# EAGLE board ArduBerry 3_0 (EAGLE 6.3)
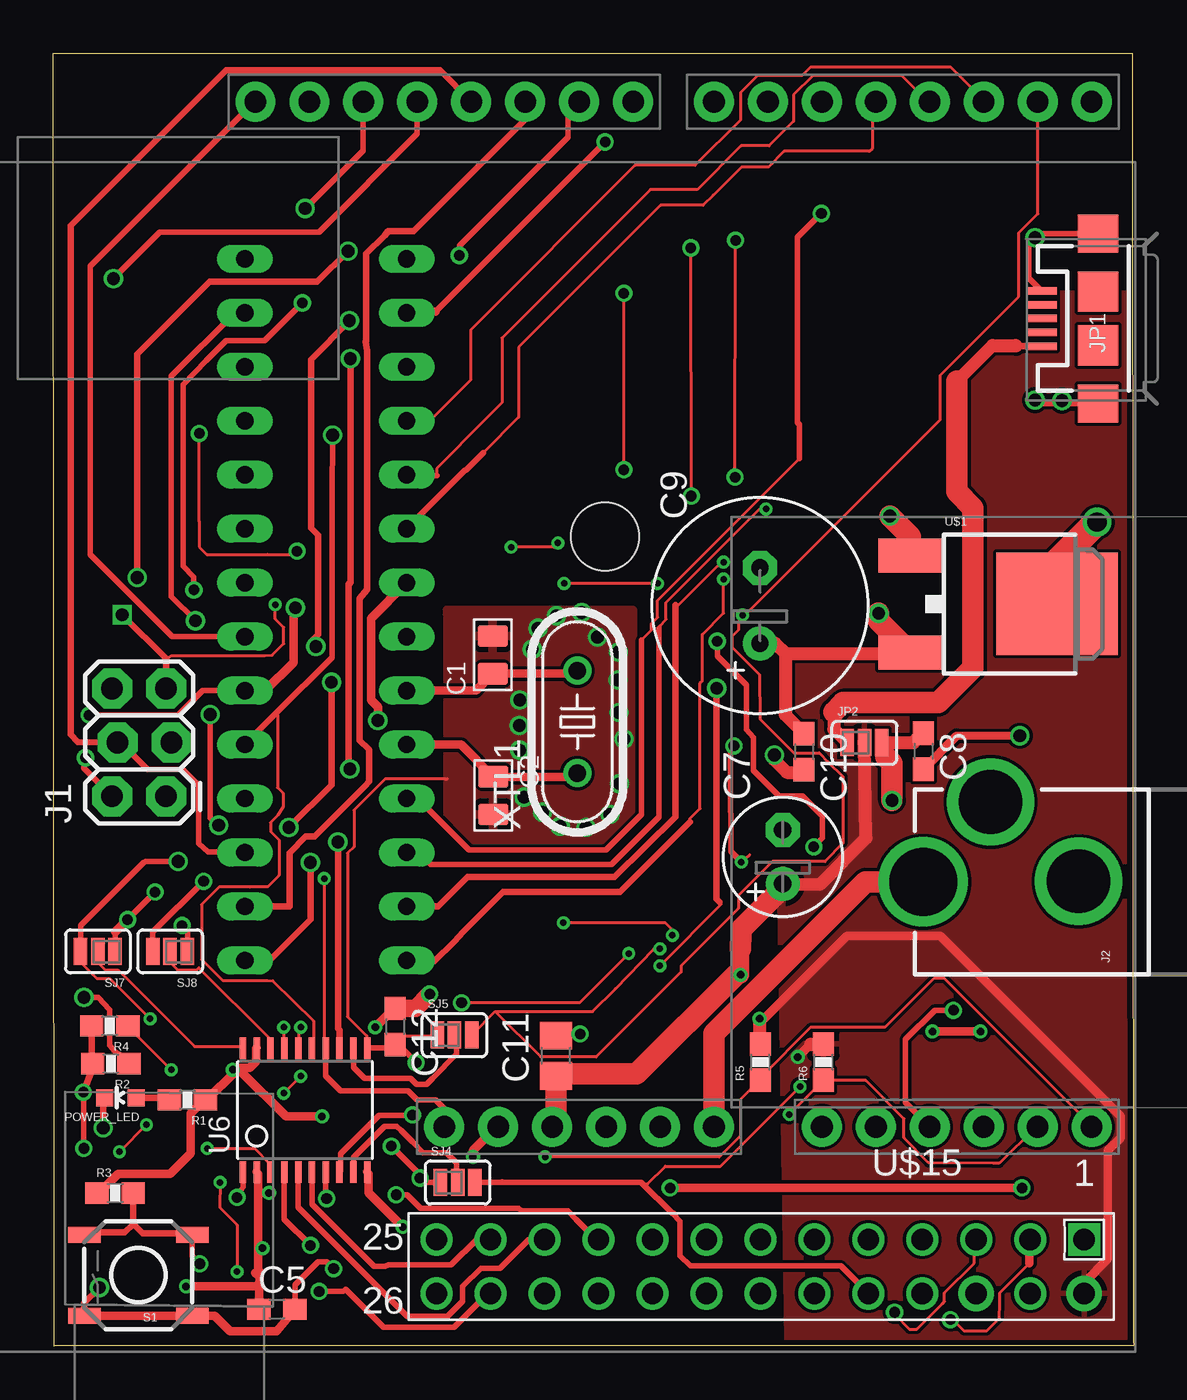
[diagram p0: board, top side]
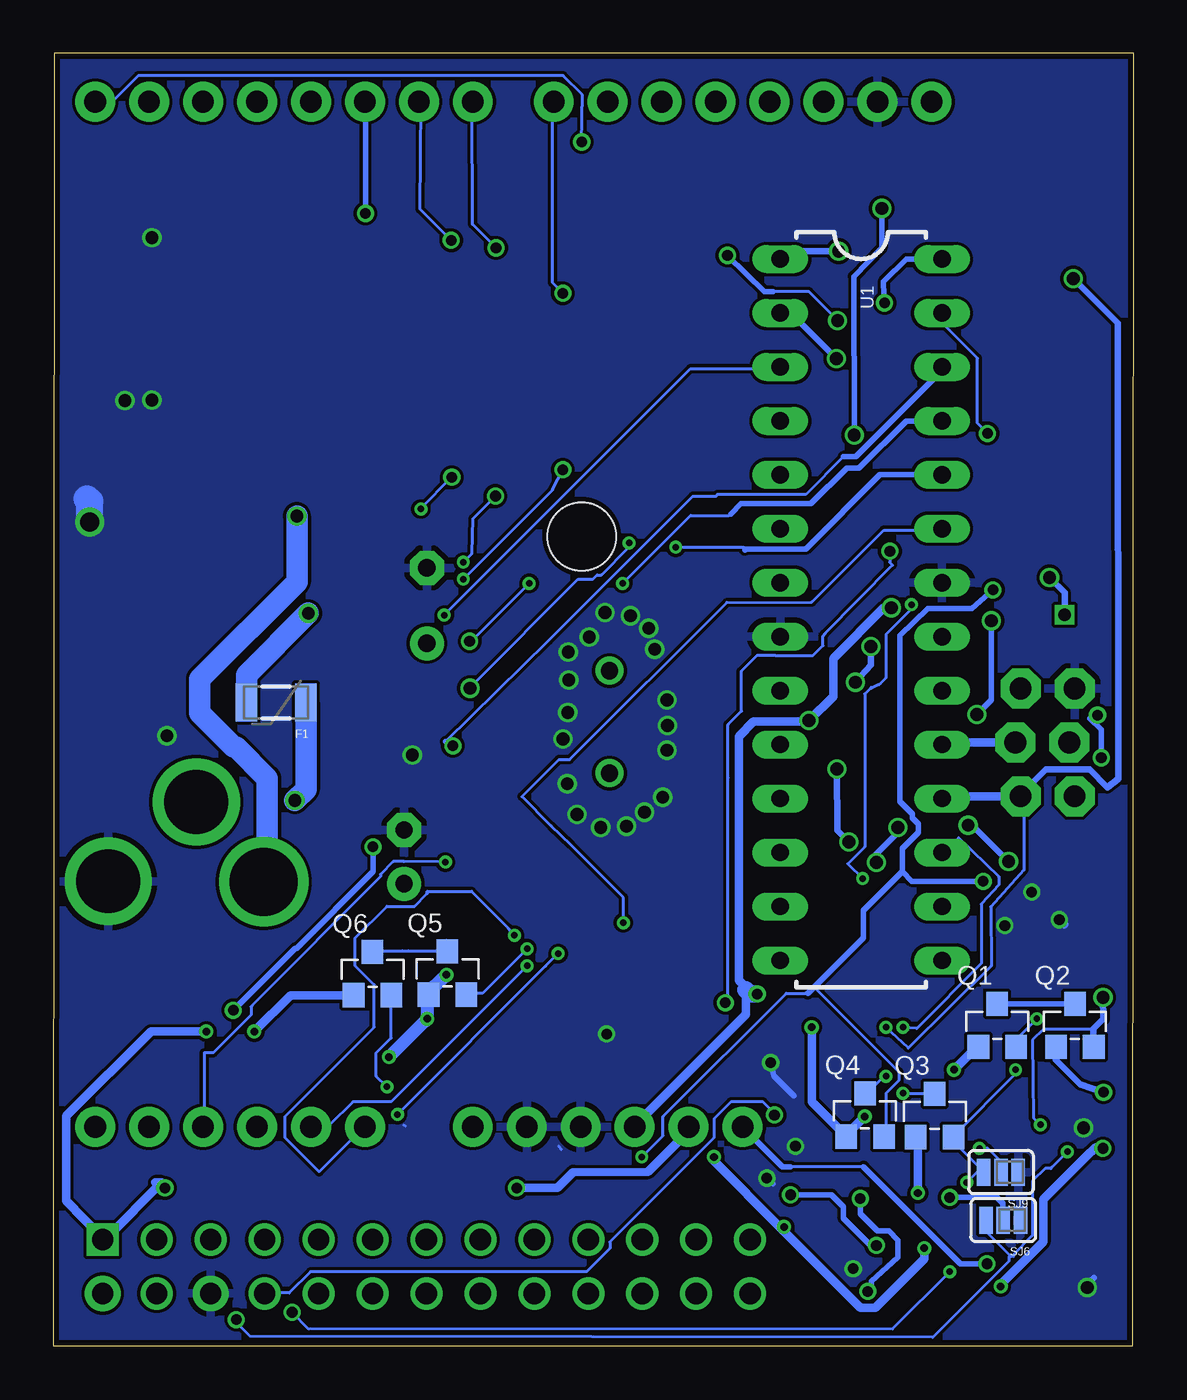
[diagram p1: board, bottom side, seen from below]

Size 50.88 x 60.89 mm. Coordinates in mm from the lower left corner, seen from the top.
Outline: 0.05,0 0,60.89 50.81,60.89 50.86,0.28 50.88,0.02 0.04,0.02
Copper layers (1*16): Top 0.035mm / dielectric 1.5mm / Bottom 0.035mm
Design rules "Fusion_eagle_rule_v1.1": minimum track width 6mil, minimum drill 12mil, track to track 6mil, track to pad 6mil, pad to pad 6mil, via to via 6mil, smd to smd 0mil, copper to edge 10mil, drill to drill 10mil, minimum pad ring 10mil, minimum via ring 6mil, stop-mask expansion 2mil, vias tented up to drill 100mil, thermal gap 10mil
Net classes: 1 DATA: width 0.203 mm, drill 0.305 mm, clearance 0.051 mm; 2 POWER: width 0.406 mm, drill 0.356 mm, clearance 0.051 mm
Holes 3.2 mm at -29.51,11.63 25.99,38.13

## Footprints (pad centres in the part's own frame; a part is rotated, then mirrored left to right if it is on the bottom)
C0805 = smd 1.016 x 1.397: 1 -0.889,0; 2 0.889,0
C0603 = smd 1.1 x 1: 1 -0.85,0; 2 0.85,0
E2,5-6 = drill 0.813 pad 1.6: + -1.27,0 | drill 0.813 pad 1.6 octagon: - 1.27,0
E3,5-10 = drill 0.813 pad 1.6: + -1.778,0 | drill 0.813 pad 1.6 octagon: - 1.778,0
C0805' = smd 1.3 x 1.5: 1 -0.95,0; 2 0.95,0
PTC-1206 = smd 1 x 1.8: 1 -1.4,0; 2 1.4,0
2X3_LOCK = drill 1.016 pad 1.88 octagon: 1 0,0; 2 0,2.54; 3 2.54,-0.254; 4 2.54,2.286; 5 5.08,0; 6 5.08,2.54
POWER_JACK_PTH_LOCK = drill 2.997 pad 4.115: GND 0.025,6.557; GNDBREAK 3.762,10.7 | drill 3.2 pad 4.115: PWR 0,13.878
USB-MICROB = smd 0.35 x 1.4: D+ 0,2.65; D- -0.65,2.65; GND 1.3,2.65; ID 0.65,2.65; VBUS -1.3,2.65 | smd 1.8 x 1.9: MT1 -4,0; MT2 4,0 | smd 1.9 x 1.9: P$1 -1.27,0; P$2 1.27,0
SJ_3_PASTE1&2 = smd 0.635 x 1.27: 1 -0.813,0; 2 0,0; 3 0.813,0
LED-0603 = smd 0.8 x 0.8: A 0,-0.75; C 0,0.75
SOT23 = smd 1.016 x 1.143: 1 -0.889,-1.016; 2 0.889,-1.016; 3 0,1.016
0603-RES = smd 1.1 x 1: 1 -0.85,0; 2 0.85,0
TACTILE_SWITCH_SMD = smd 1.524 x 0.762: 1 -2.54,1.905; 2 2.54,1.905; 3 -2.54,-1.905; 4 2.54,-1.905
DIL28-3 = drill 0.813 long: 1 -16.51,-3.81; 2 -13.97,-3.81; 3 -11.43,-3.81; 4 -8.89,-3.81; 5 -6.35,-3.81; 6 -3.81,-3.81; 7 -1.27,-3.81; 8 1.27,-3.81; 9 3.81,-3.81; 10 6.35,-3.81; 11 8.89,-3.81; 12 11.43,-3.81; 13 13.97,-3.81; 14 16.51,-3.81; 15 16.51,3.81; 16 13.97,3.81; 17 11.43,3.81; 18 8.89,3.81; 19 6.35,3.81; 20 3.81,3.81; 21 1.27,3.81; 22 -1.27,3.81; 23 -3.81,3.81; 24 -6.35,3.81; 25 -8.89,3.81; 26 -11.43,3.81; 27 -13.97,3.81; 28 -16.51,3.81
DUEMILANOVE_VIAS = drill 1.016 pad 1.88: 3.3V 50.8,13.97; 5V 50.8,16.51; A0 50.8,29.21; A1 50.8,31.75; A2 50.8,34.29; A3 50.8,36.83; A4 50.8,39.37; A5 50.8,41.91; AREF 2.54,2.54; D2 2.54,36.83; D3 2.54,34.29; D4 2.54,31.75; D5 2.54,29.21; D6 2.54,26.67; D7 2.54,24.13; D8 2.54,20.32; D9 2.54,17.78; D10 2.54,15.24; D11 2.54,12.7; D12 2.54,10.16; D13 2.54,7.62; GND@0 50.8,19.05; GND@1 50.8,21.59; GND@2 2.54,5.08; RES 50.8,11.43; RX 2.54,41.91; TX 2.54,39.37; VIN 50.8,24.13
TSSOP20 = smd 0.305 x 0.991: 1 -2.925,-2.918; 2 -2.275,-2.918; 3 -1.625,-2.918; 4 -0.975,-2.918; 5 -0.325,-2.918; 6 0.325,-2.918; 7 0.975,-2.918; 8 1.625,-2.918; 9 2.275,-2.918; 10 2.925,-2.918; 11 2.925,2.918; 12 2.275,2.918; 13 1.625,2.918; 14 0.975,2.918; 15 0.325,2.918; 16 -0.325,2.918; 17 -0.975,2.918; 18 -1.625,2.918; 19 -2.275,2.918; 20 -2.925,2.918
DPAK = smd 1.6 x 3: 1 -2.28,-5.31; 3 2.28,-5.31 | smd 4.826 x 5.715: 4 0,1.588
RASPBERRY-PI_REV1 = drill 1 square: 1 -41.91,21.59 | drill 1 pad 1.676: 2 -41.91,24.13; 6 -36.83,24.13 | drill 1: 3 -39.37,21.59; 4 -39.37,24.13; 5 -36.83,21.59; 7 -34.29,21.59; 8 -34.29,24.13; 9 -31.75,21.59; 10 -31.75,24.13; 11 -29.21,21.59; 12 -29.21,24.13; 13 -26.67,21.59; 14 -26.67,24.13; 15 -24.13,21.59; 16 -24.13,24.13; 17 -21.59,21.59; 18 -21.59,24.13; 19 -19.05,21.59; 20 -19.05,24.13; 21 -16.51,21.59; 22 -16.51,24.13; 23 -13.97,21.59; 24 -13.97,24.13; 25 -11.43,21.59; 26 -11.43,24.13
HC49/S = drill 0.813: 1 -2.413,0; 2 2.413,0

## Placement (x,y rotation side)
C1  22pF  [C0805]  20.7,32.56 90 top
C2  22pF  [C0805]  20.72,25.93 270 top
C5  0.1uf  [C0603]  10.54,1.75 0 top
C7  120uf  [E2,5-6]  34.35,23.05 90 top
C8  0.1uf  [C0603]  40.97,28.02 270 top
C9  1000uf  [E3,5-10]  33.28,34.88 90 top
C10  0.1uf  [C0603]  35.35,28 270 top
C11  10uf  [C0805']  23.68,13.69 90 top
C12  0.1uf  [C0603]  16.1,15.06 270 top
F1  PTCSMD  [PTC-1206]  40.37,30.32 180 bottom
J1  AVR_SPI_PRG_62X3_LOCK  [2X3_LOCK]  5.32,25.89 90 top
J2  POWER_JACKPTH_LOCK  [POWER_JACK_PTH_LOCK]  54.84,21.87 90 top
JP1  USB-MICROB  [USB-MICROB]  49.2,48.39 90 top
JP2  JUMPER-31-2  [SJ_3_PASTE1&2]  38.2,28.42 0 top
POWER_LED  GREEN  [LED-0603]  3.17,11.71 90 top
Q1  MOSFET-N-044020001  [SOT23]  6.43,15.11 0 bottom
Q2  MOSFET-N-044020001  [SOT23]  2.77,15.11 0 bottom
Q3  MOSFET-N-044020001  [SOT23]  9.37,10.87 0 bottom
Q4  MOSFET-N-044020001  [SOT23]  12.65,10.9 0 bottom
Q5  MOSFET-N-044020001  [SOT23]  32.31,17.58 0 bottom
Q6  MOSFET-N-044020001  [SOT23]  35.84,17.55 0 bottom
R1  330ohm  [0603-RES]  6.32,11.6 180 top
R2  10k  [0603-RES]  2.72,13.31 180 top
R3  10kOhm  [0603-RES]  2.92,7.21 0 top
R4  10k  [0603-RES]  2.67,15.09 180 top
R5  10k  [0603-RES]  33.3,13.39 90 top
R6  10k  [0603-RES]  36.27,13.39 90 top
S1  [TACTILE_SWITCH_SMD]  4.01,3.35 180 top
SJ4  [SJ_3_PASTE1&2]  19.05,7.72 0 top
SJ5  [SJ_3_PASTE1&2]  18.9,14.66 0 top
SJ6  [SJ_3_PASTE1&2]  6.15,5.94 180 bottom
SJ7  [SJ_3_PASTE1&2]  2.11,18.59 180 top
SJ8  [SJ_3_PASTE1&2]  5.51,18.59 180 top
SJ9  [SJ_3_PASTE1&2]  6.25,8.2 180 bottom
U1  ATMEGA328P_PDIP  [DIL28-3]  12.83,34.68 270 bottom
U2  ARDUINO_SHIELDNO_SILK  [DUEMILANOVE_VIAS]  6.98,61.14 270 top
U6  [TSSOP20]  11.86,11.13 0 top
U$1  LM2931_FIXED  [DPAK]  45.67,34.95 270 top
U$15  RASPBERRY-PI_REV1  [RASPBERRY-PI_REV1]  6.63,26.62 180 top
XTL1  [HC49/S]  24.68,29.4 90 top

## Library data of the parts
C1 C2 Q1-Q6 = OPL
C5 C8 C10 C12 = resistor
C7 C9 C11 = rcl
F1 = zz SparkFun
J1 J2 = SparkFun-Connectors
JP1 = SparkFun-Connectors; PROD_ID: CONN-09505
JP2 SJ4-SJ9 = SparkFun-Passives
POWER_LED = SparkFun-LED; PROD_ID: DIO-00821
R1-R6 = SparkFun-Resistors
S1 = SparkFun-Electromechanical; PROD_ID: SWCH-08247
U1 = SparkFun-DigitalIC
U2 = SparkFun-Boards
U6 = adafruit
U$1 = SparkFun-PowerIC
U$15 = RaspberryPi
XTL1 = crystal; OC_FARNELL: 1667008; OC_NEWARK: unknown

## Nets
5V_IN_USB: JP1.VBUS JP2.1
+3V3 [POWER]: C5.1 Q2.1 Q3.1 Q6.1 R2.2 R4.2 U2.3.3V U6.2 U6.10 U$15.1
+5V [POWER]: C7.+ C11.1 C12.1 J1.2 JP2.2 Q1.1 Q4.1 Q5.1 R1.1 R3.1 R5.2 R6.2 U1.7 U1.20 U2.5V U6.19 U$15.2
ARDUINO_RX: U1.2 U2.RX U6.13
ARDUINO_TX: Q5.2 SJ5.3 U1.3 U2.TX
AREF [DATA]: U1.21 U2.AREF
GND: C1.2 C2.2 C5.2 C7.- C8.2 C9.- C10.2 C11.2 C12.2 J1.6 J2.GND JP1.GND JP1.MT1 JP1.MT2 POWER_LED.C S1.1 S1.2 SJ4.1 SJ5.1 SJ6.1 SJ7.1 SJ8.1 SJ9.1 U1.8 U1.22 U2.GND@0 U2.GND@1 U2.GND@2 U6.11 U$1.4 U$15.6
MISO: J1.1 U1.18 U2.D12 U6.16
MOSI: J1.4 U1.17 U2.D11 U6.17
N$1: Q1.3 Q2.3
N$2: Q3.3 Q4.3
N$3: Q5.3 Q6.3
N$4: U$15.26
N$7: SJ6.2 U6.1
N$8: SJ9.2 U6.3
N$9: SJ4.2 U6.9
N$11: POWER_LED.A R1.2
N$13: SJ5.2 U6.12
N$14: SJ8.2 U6.18
N$15: SJ7.2 U6.20
N$48: U$15.7
N$49: U$15.9
N$50: U$15.11
N$51: U$15.13
N$52: U$15.15
N$53: U$15.17
N$54: U$15.25
N$61: U$15.22
N$62: U$15.20
N$63: U$15.18
N$64: U$15.16
N$65: U$15.14
N$66: U$15.12
OSC1: C1.1 U1.9 XTL1.2
OSC2: C2.1 U1.10 XTL1.1
PB0: U1.14 U2.D8
PB1: U1.15 U2.D9
PB2: U1.16 U2.D10
PC0: U1.23 U2.A0
PC1: U1.24 U2.A1
PC2: U1.25 U2.A2
PC3: U1.26 U2.A3
PD2: U1.4 U2.D2
PD3: U1.5 U2.D3
PD4: U1.6 U2.D4
PD5: U1.11 U2.D5
PD6: U1.12 U2.D6
PD7: U1.13 U2.D7
REG_OUT [POWER]: C8.1 F1.1 JP2.3
RESET: J1.5 R3.2 S1.3 S1.4 U1.1 U2.RES U6.14
RPI_MISO: U6.5 U$15.21
RPI_MOSI: U6.4 U$15.19
RPI_RESET: U6.7 U$15.24
RPI_RX: Q6.2 SJ4.3 U$15.10
RPI_SCK: U6.6 U$15.23
RPI_SCL: Q3.2 R4.1 SJ9.3 U$15.5
RPI_SDA: Q2.2 R2.1 SJ6.3 U$15.3
RPI_TX: U6.8 U$15.8
SCK: J1.3 U1.19 U2.D13 U6.15
SCL: Q4.2 R5.1 SJ8.3 U1.28 U2.A5
SDA: Q1.2 R6.1 SJ7.3 U1.27 U2.A4
VIN: J2.PWR U2.VIN U$1.1
VIN_5V: C9.+ C10.1 F1.2 U$1.3

## Tracks (layer width: path | path; a pad name or v marks a point on that pad's centre or on a via)
5V_IN_USB
  Top 0.305: 45.34,47.09 JP1.VBUS
  Top 0.61: 42.55,45.44 44.22,47.12 45.31,47.12 45.34,47.09 | 36.75,29.87 36.75,29.06 JP2.1
  Top 1.016: 42.55,45.44 42.55,40.23 43.31,39.47 43.31,31.93 41.68,30.3 37.19,30.3 36.75,29.87
+3V3  (via drill 0.36, 0.5)
  Top 0.254: v1.45,9.32 1.45,11.94 v1.42,11.96
  Top 0.305: R4.2 1.82,13.36 R2.2 1.87,13.09 v1.42,11.96
  Top 0.406: C5.1 9.71,2.82 | 9.71,2.82 9.71,3.32 | 9.71,3.32 9.71,3.42 | 9.71,3.42 9.72,3.52 9.72,3.53 | 9.66,4.62 9.66,3.72 9.66,3.52 9.66,3.32 9.71,3.32 | 9.66,4.62 9.66,7.22 | 9.66,7.22 9.66,8.12 U6.2 | v10.16,7.22 9.86,7.22 9.66,7.22 | v19.76,8.92 19.76,9.22 20.86,10.32 U2.3.3V | v9.86,4.62 9.66,4.62 | v43.66,14.82 v41.4,14.82 | v45.61,7.46 v29.05,7.46 | 9.71,3.42 9.56,3.42 9.51,3.47 | v16.46,5.62 14.86,7.22 14.86,8.12 U6.10 | v6.26,2.82 9.56,2.82 9.71,2.82
  Bottom 0.254: 1.78,9.37 1.55,9.22 v1.45,9.32
  Bottom 0.305: v1.42,11.96 2.51,12.34 3.66,13.49 Q2.1
  Bottom 0.406: v10.16,7.22 10.16,9.82 Q3.1 | v9.86,4.62 9.86,4.12 12.16,1.82 12.86,1.82 16.56,5.52 | 16.56,5.52 19.86,8.82 v19.76,8.92 | v41.4,14.82 39.7,16.52 36.76,16.52 Q6.1 | v43.66,14.82 46.26,14.82 50.26,10.85 50.26,6.85 48.56,5.12 U$15.1 48.36,5.12 45.76,7.72 46.06,7.72 v45.61,7.46 | v29.05,7.46 28.73,7.47 27.13,7.47 26.39,8.2 22.86,8.22 20.96,10.12 20.96,10.32 U2.3.3V | v16.46,5.62 16.56,5.52 | v6.26,2.82 6.26,2.92 4.26,4.92 4.26,6.92 2.26,8.92 1.78,9.37 | 1.46,12.12 v1.42,11.96
+5V  (via drill 0.36, 0.5, 0.6)
  Top 0.254: U1.20 7.05,30.87 5.89,29.72 v1.7,29.72 | v1.52,27.71 1.45,27.22 J1.2
  Top 0.406: U2.5V 23.68,10.34 | U1.20 9.99,30.87 11.33,32.21 11.33,34.7 v11.4,34.77 | v15.29,29.46 15.29,30.1 14.96,30.43 14.96,34.27 U1.7 | v15.16,15.02 15.96,15.82 16.06,15.82 C12.1 | 8.86,13.12 8.76,13.12 8.56,12.92 | 8.86,13.12 9.26,13.12 9.56,13.42 9.56,14.02 U6.19 | 8.56,12.92 7.26,11.62 R1.1 7.06,11.52 7.04,11.53 6.48,10.97 6.48,9.09 5.5,8.12 3.66,8.12 3.06,8.12 2.16,7.22 R3.1 | v12.66,10.82 10.96,10.82 8.86,12.92 8.86,13.12 | v8.46,13.02 8.56,12.92 | 33.26,14.32 R5.2 | v35.06,13.62 35.66,14.22 | 34.26,21.52 C7.+ | v33.26,15.42 33.46,15.42 37.36,19.32 41.76,19.32 50.26,10.82 50.26,9.82 49.66,9.22 49.66,4.12 48.56,3.02 48.56,2.52 U$15.2 | 23.86,12.82 C11.1 | 32.16,17.52 v32.36,17.5
  Top 0.61: C7.+ 36.1,21.75 38.28,23.93 JP2.2 | v33.26,15.42 33.26,14.32 | 35.66,14.22 36.26,14.22 R6.2
  Top 0.813: 32.36,18.72 v32.36,17.5 | C12.1 17.06,15.91 v17.73,16.59
  Top 1.016: 23.68,10.34 C11.1 | 32.36,18.72 32.39,19.41 32.41,19.65 34.26,21.52 | 23.86,12.82 27.46,12.82 32.16,17.52
  Bottom 0.254: v1.7,29.72 2.06,29.57 1.52,29.03 1.52,27.99 v1.52,27.71
  Bottom 0.406: v11.4,34.77 11.76,34.77 14.15,32.38 14.15,30.61 v15.29,29.46 15.46,29.42 17.89,29.42 18.59,28.72 18.59,17.22 18.26,16.89 18.26,16.79 18.26,15.62 23.46,10.42 U2.5V | 7.36,14.12 Q1.1 7.46,14.02 v8.46,13.02 | v15.16,15.02 15.16,11.52 13.56,9.92 Q4.1 13.46,10.02 v12.66,10.82 | 33.26,16.52 Q5.1 33.06,16.72 | 33.36,15.32 v33.26,15.42
  Bottom 0.61: 33.26,16.52 v33.26,15.42 | 33.36,15.32 v35.06,13.62 | 33.06,16.72 33.06,16.82 v32.36,17.5
  Bottom 0.813: v17.73,16.59 18.06,16.59 18.26,16.79
  pour Top: 33.78,49.5 34.54,0.23 50.65,0.13 50.75,49.61
ARDUINO_RX  (via drill 0.5, 0.6)
  Top 0.254: 18.01,48.72 v25.99,56.7
  Top 0.305: v14,46.51 14,35.97 13.92,35.89 13.92,30.23 | 13.92,30.23 13.92,30.2 13.92,30.23 | 13.92,30.23 13.92,27.66 v13.97,27.18 | v13.41,23.75 13.41,14.96 13.49,14.88 U6.13
  Top 0.406: 18.01,48.72 16.71,48.72 U1.2
  Bottom 0.152: v25.99,56.7 25.96,58.92 26.86,59.82 46.86,59.82 48.06,58.62 48.86,58.62 U2.RX
  Bottom 0.305: U1.2 16.14,48.65 v14,46.51 | v13.97,27.18 13.94,24.28 v13.41,23.75
ARDUINO_TX  (via drill 0.3)
  Top 0.152: v28.56,18.72 28.28,18.72 26.47,16.84 25.4,15.77 20.81,15.77 | 20.81,15.77 19.76,14.72 SJ5.3 | 32.51,34.37 34.36,36.22 41.76,43.62 41.76,45.72 45.46,49.42 45.46,52.42 46.36,53.32 46.36,58.42 U2.TX | 32.51,34.37 32.26,34.12 32.26,33.72 31.96,33.42 31.96,32.92 33.26,31.62 33.29,29.53 34.01,28.8 34.87,27.94 36.07,27.94 36.49,27.52 37.19,26.82 37.19,25.52 37.19,23.69 36.34,22.82 33.86,22.82 32.26,21.22 32.26,20.62 29.56,17.92 29.56,17.62 25.56,13.62 22.96,13.62 20.86,15.72 20.81,15.77 | v32.46,34.42 32.51,34.37
  Top 0.254: U2.TX 46.36,58.52
  Top 0.305: U1.3 17.64,46.11
  Bottom 0.152: v28.56,18.72 30.66,16.62 31.36,16.62 Q5.2 | v32.46,34.42 20.86,46.02 16.66,46.02 U1.3
AREF
  Top 0.254: U2.AREF 9.5,58.6 1.75,50.85 1.75,37.29 5.61,33.43 9.01,33.43 U1.21
GND  (via drill 0.5, 0.6, 0.9)
  Top 0.152: SJ5.1 18.06,14.62 16.46,14.62 16.16,14.32 C12.2 | 23.76,14.72 C11.2 | 34.26,24.22 C7.- | U6.11 14.76,14.12 14.76,14.62 13.86,15.52 13.86,23.22 14.16,23.52 14.16,25.25 15.64,26.72 18.46,26.72 18.57,26.72 | 46.25,44.48 46.26,44.52 v46.23,44.55 | 46.13,52.25 46.16,52.22 v46.23,52.2
  Top 0.254: JP1.MT2 46.27,52.39 46.13,52.25 45.95,52.07 45.95,50.29 JP1.GND | JP1.MT1 46.34,44.39 46.25,44.48 | U6.11 15.93,14.04 | 15.93,14.04 C12.2 | SJ4.1 17.48,7.72 v17.27,7.92 17.27,8.08 v15.93,9.42 | SJ7.1 2.92,19.51 | SJ8.1 6.32,19.56 v6.07,19.81 | 23.76,14.72 v24.8,14.72 v24.82,14.71 | v3.51,20.09 4.78,21.36 v4.8,21.39 | 15.93,14.04 16.44,14.04 v17.09,13.36 | C5.2 11.39,2.91 12.47,3.99 12.88,3.99 v13.21,3.66
  Top 0.305: POWER_LED.C 2.37,11.51 v2.36,10.29 | S1.2 1.47,2.06 v2.18,2.77
  Top 0.406: S1.2 S1.1 7.59,1.45 8.33,0.71 10.53,0.71 C5.2 | C8.2 42.53,28.74 v45.52,28.75 | 2.92,19.51 v3.51,20.09
  Top 0.61: v33.96,27.84 33.96,27.61 34.54,27.03 35.22,27.03 C10.2
  Top 1.27: U$1.4 47.26,36.92 v49.15,38.81
  Bottom 0.152: 17.36,7.92 v17.27,7.92 | U2.GND@1 28.56,10.42 28.52,10.39 | 26.16,10.32 U2.GND@0 | 26.16,10.32 U2.GND@0 | 26.16,10.32 U2.GND@0 | 26.16,10.32 U2.GND@0 | 26.16,10.32 U2.GND@0 | 26.16,10.32 U2.GND@0 | 26.16,10.32 U2.GND@0 | SJ9.1 5.46,8.22 5.44,8.22 | 34.36,10.42 34.29,10.36 34.36,10.42 | 27.06,9.42 26.95,9.27 27.06,9.42
  Bottom 0.254: v17.27,7.92 16.99,7.65 | 3.28,19.86 3.4,19.86 3.51,19.96 | v6.07,19.81 6.07,19.84 5.92,19.99 | v24.82,14.71 25.07,14.71 | v17.09,13.36 16.94,12.73 16,11.79 | v13.21,3.66 13.21,3.61 13.23,3.58 | v15.93,9.42 15.93,9.47 16.05,9.6 16.05,9.65 16.08,9.65
  Bottom 0.305: v2.18,2.77 2.18,2.92 1.88,3.23
  Bottom 0.406: v3.51,20.09 3.28,19.86
  Bottom 1.27: v49.15,38.81 49.15,39.78 49.28,39.9
  other vias: 47.5,44.53 26.62,32.69 26.59,31.37 26.64,29.85 26.87,28.6 26.67,26.49 21.97,30.43 21.95,29.24 21.97,28.07 22.17,25.86 23.04,25.15 23.88,24.49 25.1,24.43 26.21,25.04 22.56,32.82 22.83,33.81 23.7,34.39 24.89,34.54 25.63,33.4
  pour Bottom: 0.03,64.74 50.93,64.74 50.93,-0.28 0.1,-0.28 0.1,64.14
  pour Top: 18.54,34.7 27.3,34.67 27.3,23.72 18.57,23.72 18.57,34.11
MISO  (via drill 0.3, 0.6)
  Top 0.152: v11.66,15.02 11.56,14.92 11.56,14.12 U6.16
  Top 0.254: U2.D12 17.15,57.1 12.52,52.45 5.03,52.45 3.44,50.89 3.2,50.65
  Top 0.305: v2.84,50.27 2.84,50.29 3.44,50.89
  Bottom 0.152: v11.66,15.02 10.61,14.04 6.71,17.92 6.73,20.7 5.16,22.42 5.16,25.82 J1.1
  Bottom 0.305: J1.1 5.32,25.97 4.14,27.15 2.06,27.15 1.24,26.31 0.74,26.72 0.76,48.18 v2.84,50.27
  Bottom 0.406: J1.1 9.02,25.89 U1.18
MOSI  (via drill 0.3)
  Top 0.152: v10.86,15.02 10.86,14.12 U6.17
  Top 0.254: J1.4 3.19,28.43 4.45,27.15 6.1,27.15 6.86,26.42 6.86,23.67 7.29,23.27 8.6,23.27 U1.17
  Top 0.305: 3.19,28.43 1.16,28.46 0.84,28.8 0.84,52.76 8.15,60.07 18.21,60.07 U2.D11
  Bottom 0.152: v10.86,15.02 10.21,14.97 7.18,18.02 7.18,20.83 6.36,21.72 6.36,22.12 8.24,23.94 8.94,23.24 U1.17
N$1
  Bottom 0.254: Q2.3 Q1.3
N$2  (via drill 0.3)
  Top 0.152: v11.66,12.72 v10.86,11.92
  Bottom 0.152: v10.86,11.92 9.46,11.92 Q3.3 | v11.66,12.72 11.76,12.72 12.56,11.92 Q4.3
N$3
  Bottom 0.152: Q5.3 32.36,18.62 32.36,19.12 32.85,18.62 34.14,18.62 34.44,18.62 35.76,18.62 Q6.3
N$7  (via drill 0.5)
  Top 0.254: U6.1 8.94,7.51 v8.66,7.01
  Bottom 0.254: v8.66,7.01 6.45,7.01 6.17,6.73 6.17,5.97 SJ6.2
N$8  (via drill 0.3)
  Top 0.152: v7.26,9.32 9.48,9.33 10.16,8.62 10.16,8.22 U6.3
  Bottom 0.152: v7.26,9.32 6.86,9.32 6.06,8.52 6.06,8.32 6.16,8.22 SJ9.2
N$9
  Top 0.254: U6.9 14.14,8.9 15.6,10.36 16.18,10.36 16.38,10.16 16.61,9.93 16.92,9.63 17.42,9.12 17.86,9.12 18.52,9.12 19,8.64 19,7.77 SJ4.2
N$11
  Top 0.305: POWER_LED.A 5.37,11.71 R1.2
N$13
  Top 0.254: U6.12 14.14,13.14 14.66,12.62 16.46,12.62 16.84,12.62 17.12,12.34 17.58,12.34 17.86,12.62 19,13.77 19,14.55 SJ5.2
N$14
  Top 0.152: U6.18 10.16,14.12 10.16,14.52 6.86,17.82 6.76,17.72 5.86,17.72 5.26,18.32 5.46,18.52 SJ8.2
N$15
  Top 0.152: U6.20 8.86,14.12 6.66,14.12 3.06,17.72 2.46,17.72 1.86,18.32 2.06,18.52 SJ7.2
OSC1
  Top 0.406: U1.9 19.9,30.87 C1.1 24.54,31.67 XTL1.2
OSC2
  Top 0.406: XTL1.1 24.51,26.82 C2.1 19.21,28.33 U1.10
PB0  (via drill 0.3, 0.5)
  Top 0.152: v26.87,41.27 v26.87,49.58 | v31.56,36.12 31.56,34.52 30.56,33.52 30.56,31.32 30.46,31.22 30.46,25.32 29.96,24.82 29.97,24.69
  Top 0.305: U1.14 17.97,18.15 18.87,19.05 19.33,19.53 21.18,21.39 26.7,21.39 29.97,24.69
  Bottom 0.152: v26.87,41.27 27.33,40.39 27.36,40.32 v31.56,36.12 | v26.87,49.58 27.36,50.07 27.36,58.52 U2.D8
PB1  (via drill 0.5, 0.6)
  Top 0.254: v19.13,51.36 19.13,51.82 24.23,56.92 24.23,58.06 U2.D9
  Top 0.305: v13.94,48.29 13.94,48.26 12.14,46.46 12.14,38.56 | 12.14,38.56 12.14,38.53 | 12.14,38.53 12.14,38.56 | 12.14,38.56 12.14,38.53 | 12.14,38.53 12.47,38.2 12.47,33.5 12.14,33.17 v12.37,32.94 | v13.11,31.27 13.11,26.44 v11.1,24.43 | v12.12,22.78 12.12,20.09 10.46,18.44 10.2,18.17 U1.15
  Bottom 0.152: 16.99,49.65 15.29,49.65 13.96,48.32 v13.94,48.29 | 24.76,58.52 U2.D9
  Bottom 0.254: 16.99,49.65 17.39,49.65 v19.13,51.36
  Bottom 0.305: v12.37,32.94 12.37,32.08 v13.11,31.27 | v11.1,24.43 11.1,24.21 12.12,23.19 12.12,23.04 v12.12,22.78
PB2
  Top 0.305: U2.D10 22.23,57.76 16.97,52.5 15.77,52.5 15.6,52.3 14.73,51.43 14.73,49.99 14.73,47.32 14.71,47.29 14.78,46.89 14.78,43.74 14.78,35.64 14.43,35.2 14.43,28.52 14.86,28.12 14.88,28.07 14.89,26.6 14.68,26.39 12.32,24 11.89,24 11.13,23.24 11.13,20.7 U1.16
PC0  (via drill 0.3)
  Top 0.152: v29.16,19.35 29.16,19.61 28.83,19.94 v24.03,19.94
  Bottom 0.152: v29.16,19.35 29.46,19.71 31.17,21.42 33.26,21.42 33.26,21.32 33.86,20.72 35.16,20.72 36.66,19.22 36.66,17.92 35.76,17.02 35.76,15.02 39.96,10.82 39.96,9.82 38.36,8.22 36.26,10.32 U2.A0 | v24.03,19.94 24.03,21.13 26.49,23.6 27.43,24.51 28.8,25.88 27.06,27.62 26.56,27.62 19.16,35.02 15.15,35.05 11.75,38.42 9.06,38.42 U1.23
PC1  (via drill 0.3, 0.6)
  Top 0.152: v28.56,17.92 31.46,20.82 31.37,20.93 | v21.56,37.62 23.56,37.62 v23.76,37.82
  Top 0.305: v31.24,30.99 31.24,21.06 31.37,20.93
  Bottom 0.152: v28.56,17.92 34.96,11.52 36.76,11.52 37.86,10.42 38.66,10.42 U2.A1 | v21.56,37.62 18.36,37.62 18.26,37.54 | v23.76,37.82 23.76,37.62 25.06,36.32 25.26,36.32 25.46,36.12 26.16,36.12 31.16,31.12 v31.24,30.99
  Bottom 0.254: U1.24 11.95,41.03 15.44,37.54 18.26,37.54 18.31,37.49
  Bottom 0.305: 31.22,31.01 v31.24,30.99
PC2  (via drill 0.3, 0.5)
  Top 0.152: v28.46,35.92 v24.06,35.92
  Top 0.254: v31.27,33.2 31.27,32.51 32.64,31.14 32.64,29.03 32.97,28.68 32.97,27.1 34.16,25.91 35.28,25.91 36.22,24.97 36.22,23.93 v35.81,23.52 | v42.39,15.82 41.5,15.82 40.13,14.45 40.13,11.48 U2.A2
  Bottom 0.152: v24.06,35.92 20.86,39.12 19.06,39.12 18.97,39.19 | v28.46,35.92 31.16,33.22 v31.27,33.2
  Bottom 0.254: U1.25 10.71,43.57 12.93,41.35 13.51,41.35 15.19,39.67 18.49,39.67 18.97,39.19 | v35.81,23.52 35.81,22.35 39.42,18.75 39.47,18.75 v42.39,15.82
PC3  (via drill 0.3, 0.5)
  Top 0.152: 32.79,23.14 v32.41,22.8
  Top 0.254: v32.05,28.27 32.05,28.06 31.9,27.91 31.9,25.83 31.9,24.41 31.9,23.3 v32.41,22.8
  Bottom 0.152: 13.67,41.88 15.44,40.11 18.11,40.11 19.61,40.11 19.66,40.02 20.76,40.02 27.56,33.22 32.39,28.48 | v32.41,22.8 34.36,22.82 34.86,22.82 35.46,22.22 35.46,22.12 41.5,16.05 41.55,16 41.55,15.6 43.33,13.82 43.76,13.82 43.76,10.42 U2.A3
  Bottom 0.254: U1.26 9.02,45.94 13.08,41.88 13.67,41.88 | 32.39,28.48 32.26,28.48 v32.05,28.27
PD2
  Top 0.152: U1.4 16.76,43.62 17.86,43.62 17.75,43.59 19.66,45.49 19.66,47.85 27.41,55.6 30.23,55.6 32.36,57.74 32.36,58.12 32.36,59.02 33.16,59.82 35.26,59.82 35.66,60.22 42.26,60.22 43.76,58.72 U2.D2
  Top 0.254: U2.D2 43.82,58.5 | 16.66,43.59 U1.4
PD3
  Top 0.152: 18.06,41 18.06,41.12 18.06,41.32 20.32,43.61 21.13,44.42 21.13,47.47 28.12,54.46 30.33,54.46 32.39,56.51 33.71,56.51 34.86,57.67 34.86,58.12 34.86,58.92 35.76,59.82 39.96,59.82 41.16,58.62 U2.D3
  Top 0.254: U2.D3 41.28,58.47 | 18.08,41 18.06,41 16.68,41 U1.5
PD4
  Top 0.152: 20.27,42.09 21.92,43.74 21.92,47.04 28.6,53.72 30.61,53.72 31.09,54.2 32.41,55.52 33.68,55.52 34.42,56.26 38.43,56.26 38.56,56.39 38.56,58.52 U2.D4
  Top 0.254: U2.D4 38.66,58.6 | U1.6 19.4,41.25 19.43,41.25 20.27,42.09
PD5  (via drill 0.5)
  Top 0.152: 35.15,41.8 28.46,35.12 28.46,34.32 28.16,34.02 28.16,33.72 27.76,33.32 27.71,33.25
  Top 0.254: U2.D5 36.2,58.55 | 17.64,25.79 17.64,25.31 19.58,23.37 26.04,23.37 27.71,25.04 27.71,33.25 | v36.17,53.34 35.05,52.22 35.05,43.48 35.15,43.39 35.15,41.8
  Top 0.305: U1.11 17.64,25.79
  Bottom 0.152: 36.16,58.52 U2.D5
  Bottom 0.254: v36.17,53.34 36.17,58.57 U2.D5
PD6  (via drill 0.3, 0.5)
  Top 0.152: v32.11,40.92 v32.13,52.07 | v33.56,39.42 33.26,39.42 28.86,35.02 28.86,34.22 28.56,33.92 28.52,33.81
  Top 0.254: U1.12 17.19,23.25 17.78,22.68 26.29,22.68 28.52,24.92 28.52,33.81
  Top 0.305: U2.D6 33.66,58.14
  Bottom 0.152: v33.56,39.42 33.55,39.47 v32.11,40.92 | v32.13,52.07 33.59,53.53 33.56,58.52 U2.D6
PD7  (via drill 0.3, 0.5)
  Top 0.152: v30.05,40.03 v30.02,51.71 | v31.56,36.92 31.46,36.92 29.46,34.92 29.31,34.9
  Top 0.305: U1.13 18.12,20.71 | 18.12,20.71 17.92,20.74 18.12,20.71 | 18.12,20.71 19.51,22.1 25.93,22.1 26.44,22.1 29.31,24.92 29.31,34.9
  Bottom 0.152: v30.05,40.03 31.12,38.96 31.16,37.32 v31.56,36.92 | v30.02,51.71 31.14,52.83 31.16,58.52 U2.D7
REG_OUT  (via drill 0.6)
  Top 0.406: 39.22,27.74 39.22,28.22 JP2.3
  Top 0.61: JP2.3 40.5,28.42 C8.1
  Top 1.016: v39.5,25.7 39.5,27.46 39.22,27.74
  Bottom 1.016: F1.1 38.97,26.23 v39.5,25.7
RESET  (via drill 0.3, 0.5, 0.6)
  Top 0.152: v12.76,22.02 12.76,14.12 U6.14 | v10.46,34.92 10.46,34.25 10.86,33.85 10.86,33.09 10.31,32.54 9.96,32.52 5.56,32.52 5.46,32.42 5.32,32.38
  Top 0.254: U6.14 12.84,12.74 13.54,12.04 15.37,12.04 15.9,12.04 16.71,12.04 17.15,11.61 18.01,11.61 18.42,11.2 18.42,10.62 U2.RES | S1.3 6.55,4.24 v6.91,3.89
  Top 0.305: S1.4 1.57,5.36 3.38,5.36 3.77,5.75 R3.2 3.77,5.78 4.22,5.33 6.48,5.33 S1.3 | J1.5 5.32,32.38 v3.25,34.44 | v3.96,36.19 3.96,46.71 7.37,50.11 12.42,50.11 v13.89,51.56
  Bottom 0.152: 12.73,8.46 16.15,8.46 | v12.76,22.02 13.46,22.72 12.66,23.52 12.66,30.72 12.36,31.02 12.34,30.99 11.99,31.16 11.94,31.2 11.66,31.48 11.66,33.52 10.46,34.72 v10.46,34.92
  Bottom 0.254: 12.73,8.46 9.53,5.26 8.15,3.89 v6.91,3.89 | 16.15,8.46 16.54,8.46 U2.RES
  Bottom 0.305: v3.25,34.44 3.25,35.48 v3.96,36.19 | v13.89,51.56 16.27,51.56 U1.1
RPI_MISO
  Top 0.254: U$15.21 22.35,5.03 22.35,5 21.03,3.68 20.14,3.68 19.28,2.82 19.28,2.13 18.57,1.42 16.66,1.42 15.01,3.07 11.54,6.55 U6.5
RPI_MOSI  (via drill 0.5)
  Top 0.254: U$15.19 25.58,5.03 24.61,5.99 24.23,6.38 22.05,6.38 21.92,6.5 17.3,6.5 16.81,6.98 16.66,7.14 v16.15,7.14 | U6.4 10.89,5.98 v12.12,4.75
  Bottom 0.254: v12.12,4.75 12.42,4.78 13.67,6.02 13.67,6.58 14.22,7.14 v16.15,7.14
RPI_RESET  (via drill 0.5)
  Top 0.254: U$15.24 20.47,2.49 18.87,0.89 15.57,0.89 13.77,2.69 13.67,2.59 v12.52,2.59 | U6.7 12.84,7 v12.88,6.96
  Bottom 0.254: v12.88,6.96 12.88,6.25 12.07,5.44 11.53,5.44 11.1,5 11.1,4.19 12.34,3.07 12.34,2.84 12.42,2.77 12.42,2.69 v12.52,2.59
RPI_RX  (via drill 0.3)
  Top 0.152: v35.16,12.22 31.57,8.64 31.42,8.48 28.83,8.48 27.99,7.65 27.84,7.65 29.16,6.32 29.26,6.32 29.17,6.23
  Top 0.254: SJ4.3 21.11,7.72 | 21.11,7.72 21.13,7.75 | 21.11,7.72 27.69,7.72 29.17,6.23 29.51,5.89 29.51,4.27 30,3.78 37.08,3.78 U$15.10
  Bottom 0.152: v35.16,12.22 35.66,12.72 35.66,13.82 34.96,14.52 Q6.2
RPI_SCK
  Top 0.254: U$15.23 19.94,5.03 18.75,3.84 15.8,3.84 15.62,3.76 15.11,3.76 15.01,3.86 12.19,6.69 U6.6
RPI_SCL  (via drill 0.3, 0.5)
  Top 0.152: v5.56,13.02 3.56,15.02 R4.1 | 43.36,5.02 43.36,3.92 41.96,2.52 41.96,2.12 41.86,2.01 40.67,0.81 40.31,0.81 39.62,1.5 v39.62,1.61 | v8.66,3.52 8.66,5.72 7.85,6.54 v7.86,7.72
  Top 0.406: U$15.5 43.37,5.03 43.36,5.02
  Bottom 0.152: v5.56,13.02 5.56,12.82 8.46,9.92 Q3.2 8.46,9.82 8.56,9.72 7.06,8.22 SJ9.3 7.26,8.32 v7.86,7.72 | v39.62,1.61 39.62,1.6 38.84,0.81 11.36,0.82 v8.66,3.52
RPI_SDA  (via drill 0.3, 0.5, 0.6)
  Top 0.152: v4.39,10.44 v3.12,9.17 | 45.96,3.92 44.56,2.52 44.56,2.02 44.55,1.32 43.97,0.74 42.88,0.74 42.35,1.26 v42.25,1.26
  Top 0.254: v1.45,16.43 2.13,16.43 2.67,15.85 2.67,14.17 2.92,13.87 3.16,13.72 R2.1
  Top 0.305: R2.1 3.57,13.5
  Top 0.406: 45.96,3.92 45.96,4.99 U$15.3
  Bottom 0.152: 5.81,4.27 5.76,4.22 5.71,4.27 | 5.81,4.27 6.86,5.32 6.86,5.92 SJ6.3 | 5.71,4.27 4.76,5.22 4.76,7.79 4.17,8.38 3.91,8.38 3.86,8.43 | v4.39,10.44 4.72,10.77 4.76,14.42 4.26,14.92 1.97,14.92 1.9,14.94 | v3.12,9.17 3.86,8.43 | 3.86,8.41 3.89,8.38 3.89,8.41 3.86,8.43 | v42.25,1.26 42.25,1.13 41.61,0.48 9.46,0.42 5.86,4.02 5.86,4.22 5.81,4.27 | 5.66,4.22 5.71,4.27
  Bottom 0.305: v1.45,16.43 1.42,15.42 1.9,14.94 Q2.2
RPI_TX  (via drill 0.5)
  Top 0.254: v16.92,10.9 16.84,10.9 16.81,10.87 15.34,10.87 13.54,9.07 13.54,8.26 U6.8
  Bottom 0.152: U$15.8 40.86,2.52 39.76,2.52 38.76,3.52 25.76,3.52 24.66,4.62 24.66,4.92 19.76,9.82 19.76,10.72 18.96,11.52 17.46,11.52 16.96,11.02 v16.92,10.9
SCK  (via drill 0.6)
  Top 0.152: U6.15 12.26,14.12 12.26,15.32 10.34,17.22 10.09,17.22 7.99,17.22 6.99,18.22 6.99,20.8 7.81,21.62 9.26,21.62 10.11,21.64 10.64,22.17 10.64,22.18 10.64,23.84 10.25,24.24 10.24,24.66 10.56,24.99 10.82,25.4 10.83,26.05 10.56,26.31 10.56,29.72 10.49,29.8
  Top 0.254: U2.D13 14.61,56.29 v11.86,53.57 | v13.16,42.9 13.13,39.98 13.13,32.44 10.49,29.8 U1.19
  Bottom 0.254: v11.86,53.57 11.86,51.71 13.18,50.37 v13.16,42.9
  Bottom 0.406: J1.3 9.02,28.43 U1.19
SCL  (via drill 0.3, 0.5)
  Top 0.152: U2.A5 48.86,10.42 41.96,17.32 41.46,17.32 39.16,15.02 35.66,15.02 33.36,12.72 33.36,12.62 R5.1 33.26,12.52 32.36,11.62 32.36,9.92 31.36,8.92 v23.16,8.92
  Top 0.254: v11.73,49.12 9.96,47.35 8.15,47.35 7.21,46.41 6.12,45.29 6.12,36.73 6.63,36.22 v6.63,35.61 | SJ8.3 4.7,19.51 v7.09,21.89
  Bottom 0.152: Q4.2 11.66,9.92 11.66,11.92 11.06,12.52 11.06,12.92 14.96,16.82 15.05,16.91 | v23.16,8.92 22.16,9.92 22.16,10.82 16.36,16.62 15.46,16.62 15.34,16.61
  Bottom 0.254: U1.28 8.6,51.19 10.71,51.19 11.79,50.11 11.79,50.04 v11.73,49.12 | v6.63,35.61 7.62,34.75 9.7,34.75 11,33.48 11,25.65 10.41,25.07 10.41,24.87 10.13,24.59 10.13,24.21 10.9,23.44 10.9,22.35 | 10.9,22.35 12.73,20.52 12.73,19.23 15.05,16.91 15.34,16.61 | v7.09,21.89 10.44,21.89 10.9,22.35
SDA  (via drill 0.3, 0.5, 0.6)
  Top 0.152: v4.56,15.42 2.66,17.32 2.06,17.32 1.06,18.32 1.26,18.52 SJ7.3 | U2.A4 46.26,10.32 44.55,8.63 44.25,8.63 41.21,8.64 40.06,9.82 40.06,10.72 38.26,12.52 36.36,12.52 R6.1 36.26,12.52 v34.66,10.92 | v6.88,42.98 6.88,38.84 6.88,37.64 7.24,37.29 10.08,37.29 11.33,37.29 v11.48,37.44 | v27.1,18.49 24.79,16.18 19.89,16.18 v19.23,16.18
  Top 0.254: U1.27 8.54,48.65 5.56,45.67 5.56,35.31 v6.71,34.16 | v7.39,29.74 7.39,24.87 v7.8,24.54 | v5.89,22.83 4.37,22.83 4.27,22.78 2.84,21.36 2.06,20.57 1.3,19.81 SJ7.3
  Bottom 0.152: v4.56,15.42 5.46,14.52 5.46,14.12 Q1.2 | v6.88,42.98 7.36,43.46 7.36,46.52 8.96,48.12 8.96,48.62 U1.27 | v34.66,10.92 27.69,17.91 v27.1,18.49 | v19.23,16.18 19.09,16.42 19.09,26.77 19.09,29.28 18.47,29.9 18.49,29.93 18.49,31.78 17.75,32.52 16.86,32.52 15.66,32.52 15.1,32.52 14.63,32.99 14.63,33.45 14.53,33.55 11.36,36.78 11.48,36.9 v11.48,37.44
  Bottom 0.254: v6.71,34.16 6.71,30.43 v7.39,29.74 | v7.8,24.54 7.8,24.74 v5.89,22.83
VIN  (via drill 0.6)
  Top 1.016: U$1.1 40.36,38.13 v39.4,39.09 | J2.PWR 38.25,21.87 31.12,14.73 U2.VIN
  Bottom 1.016: v39.4,39.09 39.4,35.99 43.97,31.42 43.97,29.82 42.37,28.22 42.27,28.22 40.79,26.75 40.79,22.04 J2.PWR
VIN_5V  (via drill 0.6)
  Top 0.61: C9.+ 33.98,33.1 34.47,32.61 | 34.47,32.61 40.3,32.61 U$1.3 | 34.47,32.61 34.47,29.73 C10.1
  Top 1.016: v38.86,34.52 38.86,34.17 U$1.3
  Bottom 1.016: F1.2 41.77,31.61 v38.86,34.52